# Altium PCB V1_1001_REV2.PcbDoc
Units mm, origin at the board's own origin, x right, y up, seen from the top; angles counter-clockwise.
Board outline 144.91 x 26.54 mm, 1 copper layers (Top Layer); 104 components, 0 nets, 0 pads, 0 vias.
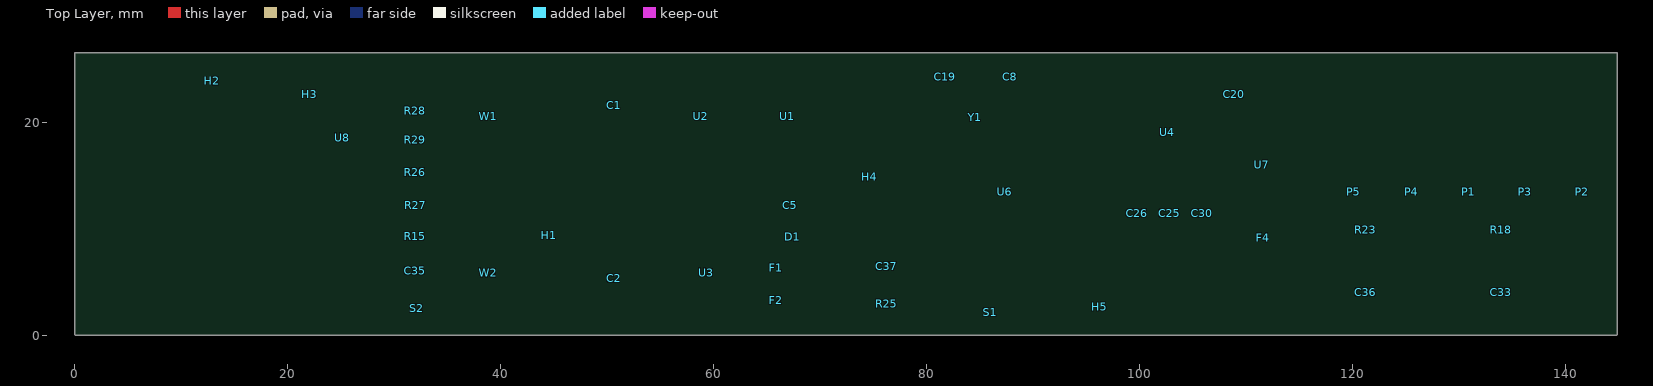
[diagram p0: Top Layer view]
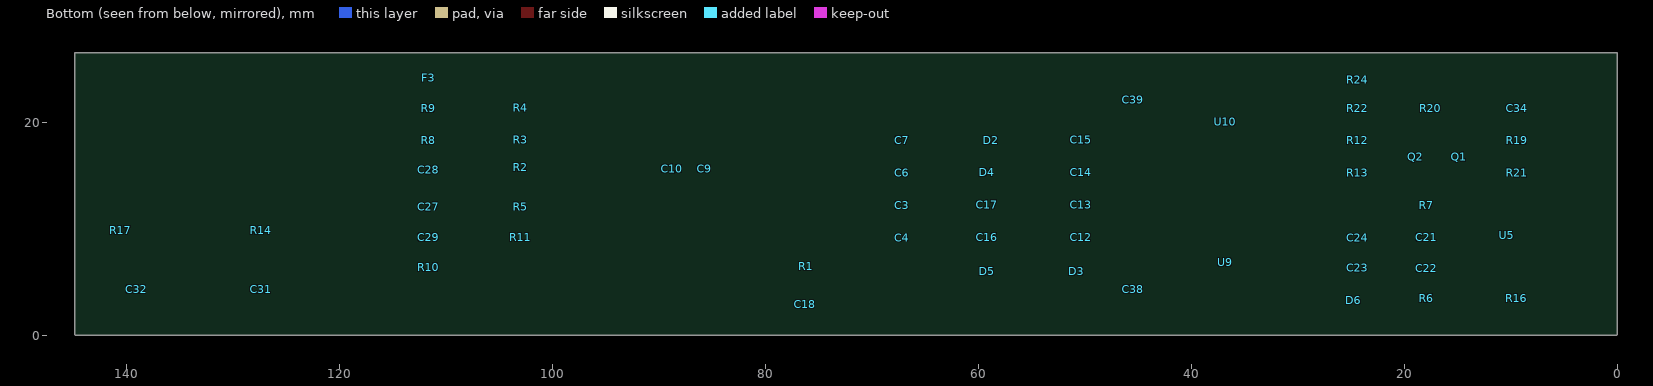
[diagram p1: Bottom view, seen from below]

## Layer stack, top to bottom
Top Layer: signal copper 0.0356

## Board outline
0,0.127 ccw(c0.127,0.127) 0.127,0 144.78,0 ccw(c144.78,0.127) 144.907,0.127 144.907,26.416 ccw(c144.78,26.416) 144.78,26.543 0.127,26.543 ccw(c0.127,26.416) 0,26.416

## Components (designator, comment, footprint, x,y, rotation, side; value= is the part's Value field where it differs from the comment)
C1 "" C_CYL_SMD2 50.673,21.59 r0 top
C2 "" C_CYL_SMD2 50.673,5.334 r0 top
C3 "" 1206 67.183,12.192 r270 bottom
C4 "" 1206 67.183,9.144 r270 bottom
C5 "" 1206 67.208,12.192 r270 top
C6 "" 1206 67.183,15.24 r270 bottom
C7 "" 1206 67.183,18.288 r270 bottom
C8 "" 1206 87.884,24.257 r270 top
C9 "" 1206 85.725,15.621 r180 bottom
C10 "" 1206 88.773,15.621 r180 bottom
C12 "" 1206 50.38,9.195 r90 bottom
C13 "" 1206 50.38,12.243 r90 bottom
C14 "" 1206 50.38,15.291 r90 bottom
C15 "" 1206 50.38,18.339 r90 bottom
C16 "" 1206 59.182,9.195 r90 bottom
C17 "" 1206 59.182,12.243 r90 bottom
C18 "" 1206 76.288,2.921 r270 bottom
C19 "" 1206 81.788,24.257 r90 top
C20 "" 1206 108.914,22.606 r180 top
C21 "" 1206 17.889,9.203 r90 bottom
C22 "" 1206 17.889,6.297 r90 bottom
C23 "" 1206 24.402,6.313 r270 bottom
C24 "" 1206 24.402,9.152 r270 bottom
C25 "" 1206 102.87,11.43 r0 top
C26 "" 1206 99.822,11.43 r0 top
C27 "" 1206 111.658,12.078 r90 bottom
C28 "" CAP_SMD_A 111.62,15.541 r180 bottom
C29 "" 1206 111.658,9.195 r90 bottom
C30 "" 1206 105.918,11.43 r0 top
C31 "" CAP_SMD_D 127.381,4.318 r180 bottom
C32 "" CAP_SMD_D 139.065,4.318 r180 bottom
C33 "" CAP_SMD_D 133.985,4.013 r180 top
C34 "" 1206 9.398,21.311 r270 bottom
C35 "" 1206 32.004,6.071 r90 top
C36 "" CAP_SMD_D 121.285,4.013 r180 top
C37 "" 1206 76.288,6.452 r270 top
C38 "" 1206 45.466,4.318 r0 bottom
C39 "" 1206 45.466,22.098 r0 bottom
D1 "" ZINER 67.437,9.22 r270 top
D2 "" TVS 58.801,18.288 r270 bottom
D3 "" ZINER 50.761,5.994 r90 bottom
D4 "" ZINER 59.182,15.316 r270 bottom
D5 "" TVS 59.182,6.02 r270 bottom
D6 "" TVS 24.765,3.302 r90 bottom
F1 "" HDR1X3 65.913,6.35 r0 top
F2 "" HDR1X3 65.913,3.302 r0 top
F3 "" 1206 111.633,24.167 r270 bottom
F4 "" 1206 111.658,9.144 r270 top
H1 "" XH_4_me 44.577,9.398 r90 top
H2 "" H1.27 12.954,23.901 r180 top
H3 "" "White SMD Connector 6pin B" 22.098,22.606 r180 top
H4 "" "White SMD Connector 6pin B" 74.676,14.859 r90 top
H5 "" "White SMD Connector 6pin B" 96.266,2.667 r0 top
P1 "" PH_6_ME 130.937,13.462 r90 top locked
P2 "" PH_6_ME 141.605,13.462 r90 top locked
P3 "" PH_6_ME 136.271,13.462 r90 top locked
P4 "" PH_6_ME 125.603,13.462 r90 top locked
P5 "" PH_6_ME 120.142,13.462 r90 top locked
Q1 "" sot23 14.859,16.764 r180 bottom
Q2 "" sot23 18.923,16.764 r180 bottom
R1 "" 1206 76.2,6.477 r270 bottom
R2 "" 1206 102.997,15.791 r90 bottom
R3 "" 1206 102.997,18.339 r90 bottom
R4 "" 1206 102.997,21.362 r90 bottom
R5 "" 1206 102.997,12.078 r90 bottom
R6 "" 1206 17.889,3.458 r90 bottom
R7 "" 1206 17.889,12.192 r90 bottom
R8 "" 1206 111.633,18.288 r270 bottom
R9 "" 1206 111.633,21.311 r270 bottom
R10 "" 1206 111.658,6.364 r90 bottom
R11 "" 1206 102.997,9.195 r90 bottom
R12 "" 1206 24.384,18.288 r270 bottom
R13 "" 1206 24.384,15.24 r270 bottom
R14 "" 1206 127.381,9.855 r270 bottom
R15 "" 1206 32.004,9.271 r90 top
R16 "" 1206 9.435,3.458 r90 bottom
R17 "" 1206 140.589,9.855 r270 bottom
R18 "" 1206 133.985,9.906 r90 top
R19 "" 1206 9.398,18.288 r270 bottom
R20 "" 1206 17.526,21.311 r270 bottom
R21 "" 1206 9.398,15.24 r270 bottom
R22 "" 1206 24.384,21.311 r270 bottom
R23 "" 1206 121.285,9.906 r90 top
R24 "" 1206 24.384,24.003 r270 bottom
R25 "" 1206 76.288,2.972 r90 top
R26 "" 1206 32.004,15.291 r90 top
R27 "" 1206 32.041,12.192 r270 top
R28 "" 1206 32.004,21.082 r90 top
R29 "" 1206 32.004,18.339 r90 top
S1 "" PB4x3.2 85.979,2.157 r180 top
S2 "" PB4x3.2 32.131,2.54 r180 top
U1 "" DPAK 66.929,20.574 r270 top
U2 "" DPAK 58.801,20.574 r270 top
U3 "" DPAK 59.309,5.842 r90 top
U4 "" TSSOP20 102.616,19.05 r0 top
U5 "" TSSOP16 10.414,9.398 r90 bottom
U6 "" 32A_L 87.376,13.462 r270 top
U7 "" TSSOP10_N 111.506,16.002 r90 top
U8 "" "esp8266 esp-12-e" 25.146,18.542 r90 top
U9 "" SMD8 36.83,6.858 r0 bottom
U10 "" SMD8 36.83,20.066 r0 bottom
W1 "" Wall 38.862,20.574 r0 top
W2 "" Wall 38.862,5.842 r0 top
Y1 "" XTAL_SMD 84.582,20.447 r180 top

## Footprints (in the part's own frame and the unit in brackets; to place one, negate y for a bottom-side part, rotate by r counter-clockwise, add the part's x,y. Pads: shape width x height; smd on the part's side, far side on the other; paste and mask are expansions set on the pad)
32A_L [mm] "Thin QFP, 32-Leads, Body 7x7mm, Pitch 0.8mm, IPC High Density"
1206 [mm]
C_CYL_SMD2 [mm]
CAP_SMD_A [mm]
CAP_SMD_D [mm]
DPAK [mm]
"esp8266 esp-12-e" [mm] "ESP8266 ESP-12-E"
H1.27 [mm]
HDR1X3 [mm] "Connector; Header; 3 Position"
PB4x3.2 [mm]
PH_6_ME [mm]
SMD8 [mm] "6N137"
sot23 [mm]
TSSOP10_N [mm] "TSSOP, 10-Leads, Body 3x3mm, Pitch 0.5mm, IPC Medium Density"
TSSOP16 [mm] "Shrink Small Outline; 16 Leads; Body Width 4.4 mm; Pitch 0.65 mm"
TSSOP20 [mm]
TVS [mm]
Wall [mm]
"White SMD Connector 6pin B" [mm] "White SMD Connector 6pin"
XH_4_me [mm]
XTAL_SMD [mm]
ZINER [mm]

## Part data
C1 C2: library part "Cap Pol", "pol cap, Ele"
C3 C4 C5 C6 C7 C12 C13 C14 C15 C16 C17 C21 C22 C23 C24 C29 C30 C39: library part Cap, "Capacitor, 1206"
C8 C9 C10 C18 C19 C25 C26 C27 C34 C35 C37 C38: library part Cap, "Capacitor"
C20: library part Cap, "Capacitor, 1206, 100nf"
C28: library part "Cap Pol", "Tantalium Capacitor"
C31 C32 C33 C36: library part "Cap Pol", "pol cap, tan"
D1 D3 D4: library part "D Schottky", "Schottky Diode, 1N4148"
D2 D5 D6: library part "Diode 18TQ045", "Schottky Rectifier"
F1 F2: library part "EMI Filter"
F3 F4: library part Inductor, "Inductor"
H1: library part "Header 4", "White Connector 4pin"
H2: library part "Header 2", "Header, 2-Pin, 1.27mm"
H3 H4 H5: library part "Header 6", "White SMD Connector 6pin"
P1 P2 P3 P4 P5: library part "Header 6", "SH, 6-Pin, 2mm"
Q1 Q2: library part 2N2222, "General Purpose Transistor NPN Silicon"
R1 R15 R27: library part Res1, "Resistor, 6.8k"
R2 R3 R4 R5: library part Res1, "Resistor, 1206, 4.7k"
R6 R7 R8 R9 R10 R11 R12 R13 R22 R24 R25 R26 R28 R29: library part Resistor, "General Resistor"
R14 R17 R18 R23: library part Res1, "Resistor, 1206"
R16 R19 R20 R21: library part Res1, "Resistor"
S1 S2: library part SW-PB, "Switch"
U1 U2 U3: library part L7805CD2T, "Positive Voltage Regulator"
U4: library part M74HC541B1R, "Octal Bus Buffer with 3 State Outputs (Non Inverted)"
U5: library part MAX1793
U6: library part ATmega328P-AU, "8-bit AVR Microcontroller, 32KB Flash, 1KB EEPROM, 2KB SRAM, 32-pin TQFP, Industrial Grade (-40癈 to 85癈)"
U7: library part ADS1115
U8: library part ESP8266
U9 U10: library part 6N137
W1 W2: library part Wall
Y1: library part XTAL, "Crystal Oscillator, 14.7456KHz"

## Nets (pads, with @x,y where several pads share a name; then routed paths per layer and width w, separated by ;. In a path a pad name is that pad's centre, name@x,y a point inside that pad or via, vN(x,y) a via of type N, cw(c..) or ccw(c..) an arc to the next point about the centre after c; other vN are vias at no path point)